# Allegro board VCO.brd
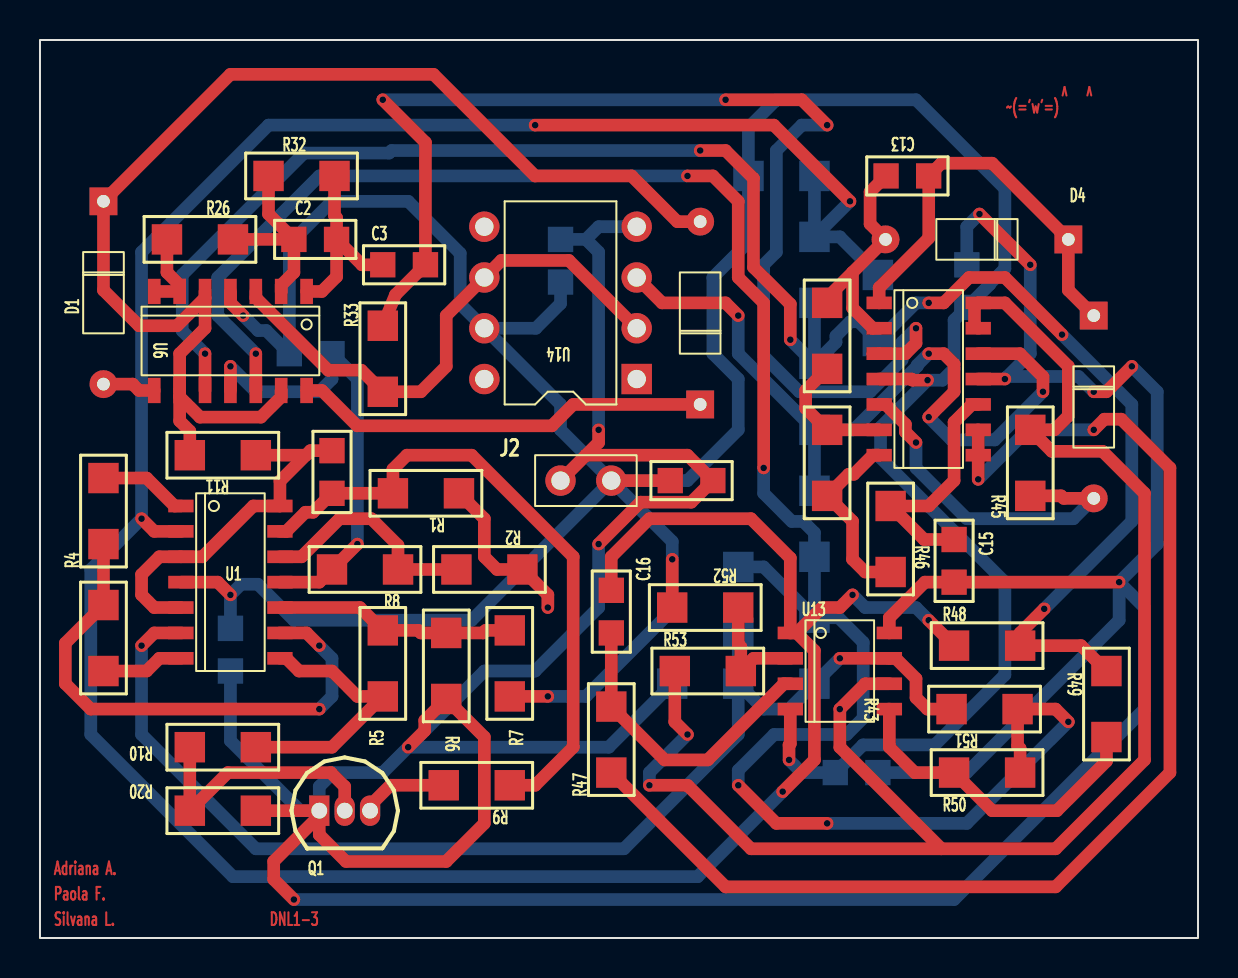
[diagram p0: board, top side]
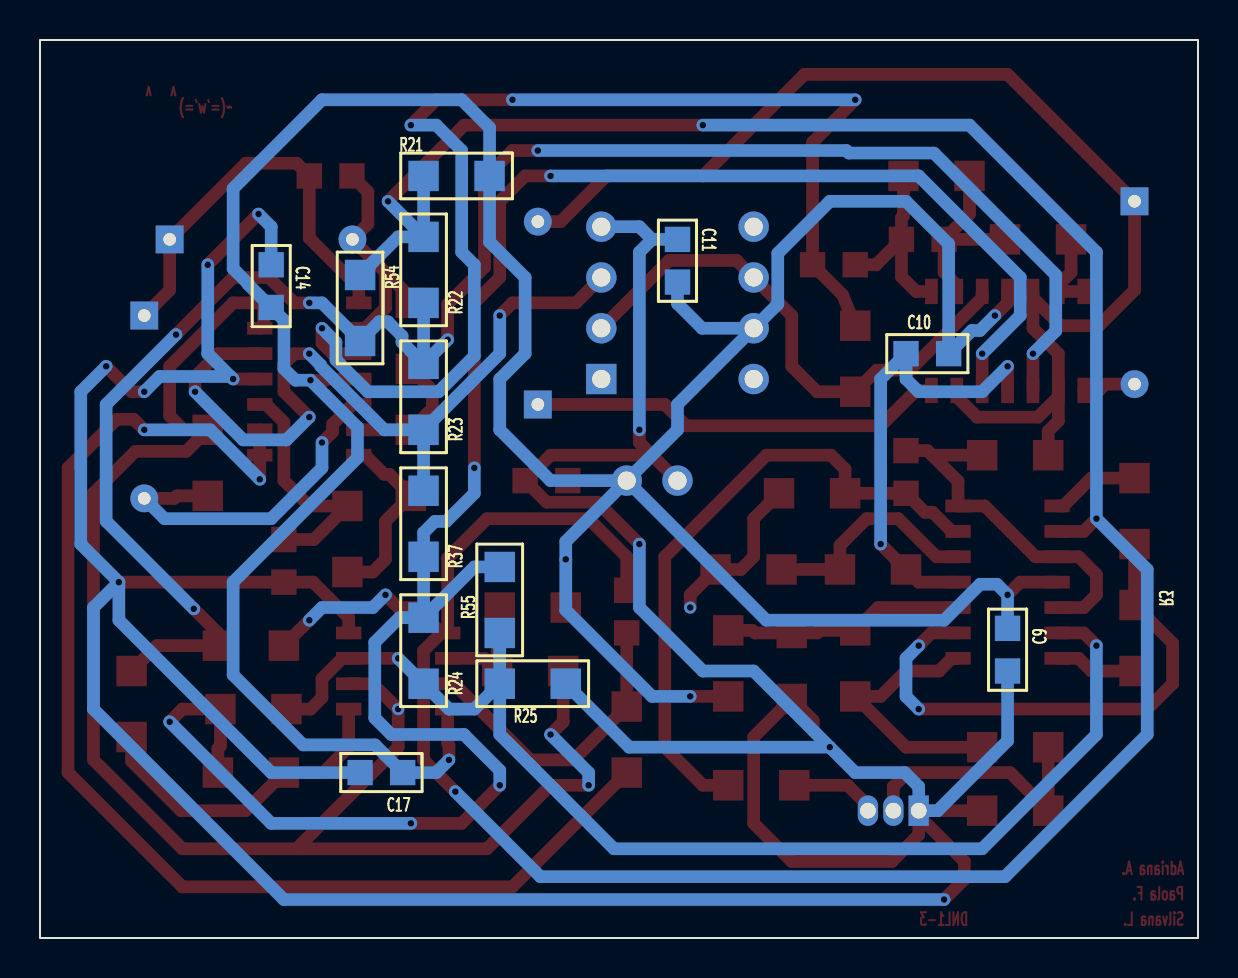
[diagram p1: board, bottom side, seen from below]

Outline 57.92 x 44.92 mm; copper layers: TOP, BOTTOM. Coordinates in mm from the lower left corner of the outline.
Outline path: rectangle 0,0 57.92,44.92

## Design rules (mm)
constraint set DEFAULT: min track width 0.127

## Placement (name value [footprint] x y rotation side)
C1  100n  [SMC0805]  14.61 22.25 90 top
C2  100n  [SMC0805]  12.7 34.95 0 top
C3  100n  [SMC0805]  17.14 33.68 0 top
C8  100u  [SMC0805]  33.66 22.88 180 top
C9  100n  [SMC0805]  9.53 13.36 90 bottom
C10  100n  [SMC0805]  14.61 29.23 180 bottom
C11  100n  [SMC0805]  26.04 34.95 270 bottom
C13  1n  [SMC0805]  44.45 38.12 180 top
C14  100n  [SMC0805]  46.35 33.68 270 bottom
C15  1n  [SMC0805]  45.72 17.8 90 top
C16  1n  [SMC0805]  28.57 15.26 90 top
C17  100n  [SMC0805]  41.91 8.28 180 bottom
D1  D1N4148  [DO35]  3.17 36.85 180 top
D2  D1N4148  [DO35]  33.02 26.69 0 top
D4  D1N4148  [DO35]  51.44 34.95 90 top
D5  D1N4148  [DO35]  52.7 31.13 180 top
J2  HEADER 2  [JUMPER2]  26.04 22.88 0 top
Q1  2N2222  [TO92]  13.97 6.37 0 top
R1  68k  [SMR1206]  20.95 22.25 180 top
R2  100k  [SMR1206]  24.13 18.43 180 top
R3  1k  [SMR1206]  3.17 13.36 90 top
R4  1k  [SMR1206]  3.17 19.7 90 top
R5  10k  [SMR1206]  17.14 12.08 90 top
R6  10k  [SMR1206]  20.32 15.26 270 top
R7  10k  [SMR1206]  23.5 12.08 90 top
R8  100k  [SMR1206]  14.61 18.43 0 top
R9  34k  [SMR1206]  23.5 7.64 180 top
R10  50k  [SMR1206]  10.79 9.54 180 top
R11  1k  [SMR1206]  10.79 24.15 180 top
R20  10k  [SMR1206]  10.79 6.37 180 top
R21  33k  [SMR1206]  38.73 38.12 180 bottom
R22  10k  [SMR1206]  38.73 31.77 90 bottom
R23  10k  [SMR1206]  38.73 25.42 90 bottom
R24  10k  [SMR1206]  38.73 12.72 90 bottom
R25  33k  [SMR1206]  34.92 12.72 180 bottom
R26  20k  [SMR1206]  6.35 34.95 0 top
R32  200k  [SMR1206]  11.43 38.12 0 top
R33  300k  [SMR1206]  17.14 27.32 90 top
R37  10k  [SMR1206]  38.73 19.07 90 bottom
R43  1k  [SMR1206]  39.37 31.77 270 top
R44  1k  [SMR1206]  39.37 25.42 270 top
R45  1k  [SMR1206]  49.53 25.42 270 top
R46  1k  [SMR1206]  42.55 21.61 270 top
R47  1k  [SMR1206]  28.57 8.28 90 top
R48  1k  [SMR1206]  45.72 14.62 0 top
R49  1k  [SMR1206]  53.34 13.36 270 top
R50  1k  [SMR1206]  45.72 8.28 0 top
R51  1k  [SMR1206]  48.9 11.45 180 top
R52  1k  [SMR1206]  34.92 16.53 180 top
R53  1k  [SMR1206]  31.75 13.36 0 top
R54  10k  [SMR1206]  41.91 29.86 90 bottom
R55  10k  [SMR1206]  34.92 15.26 90 bottom
U1  TL074/301/TI  [SOIC14]  9.53 17.8 0 top
U6  LM324  [SOIC14]  9.53 29.86 270 top
U12  LM324  [SOIC14]  44.45 27.96 0 top
U13  TL072/301/TI  [SOIC8]  40.01 13.36 0 top
U14  OP-07  [DIP8_3]  29.84 27.96 180 top

## Library data of the parts
C1-C3 C8-C11 C13-C17 = C
D1 D2 D4 D5 = 1N4148
J2 = HEADER 2
Q1 = 2N2222
R1-R11 R20-R26 R32 R33 R37 R43-R55 = R
U1 = TL074/301/TI
U6 U12 = LM324
U13 = TL072/301/TI
U14 = OP-07_1

## Footprints (pads in the part's own frame, mm; a bottom-side part is the same pattern mirrored in y, then rotated)
DIP8_3
  rect 1.524x1.524 hole 0.914: 1(0,0)
  round 1.524 hole 0.914: 2(0,-2.54) 3(0,-5.08) 4(0,-7.62) 5(7.62,-7.62) 6(7.62,-5.08) 7(7.62,-2.54) 8(7.62,0)
DO35
  rect 1.397x1.397 hole 0.635: 1(0,0)
  round 1.397 hole 0.635: 2(0,9.144)
JUMPER2
  round 1.524 hole 0.914: 1(0,0) 2(2.54,0)
SMC0805
  rect 1.27x1.27 smd: 1(0,0) 2(2.134,0)
SMR1206
  rect 1.524x1.524 smd: 1(0,0) 2(3.302,0)
SOIC8
  rect 1.27x0.635 smd: 1(-2.477,1.905) 2(-2.477,0.635) 3(-2.477,-0.635) 4(-2.477,-1.905) 5(2.477,-1.905) 6(2.477,-0.635) 7(2.477,0.635) 8(2.477,1.905)
SOIC14
  rect 1.27x0.635 smd: 1(-2.477,3.81) 2(-2.477,2.54) 3(-2.477,1.27) 4(-2.477,0) 5(-2.477,-1.27) 6(-2.477,-2.54) 7(-2.477,-3.81) 8(2.477,-3.81) 9(2.477,-2.54) 10(2.477,-1.27) 11(2.477,0) 12(2.477,1.27) 13(2.477,2.54) 14(2.477,3.81)
TO92
  rect 1.016x1.524 hole 0.787: 1(0,0)
  oval 1.016x1.524 hole 0.787: 2(1.27,0) 3(2.54,0)

## Nets
V1: C16.2 R21.1 R22.2 R48.1 R54.2 U1.2 U13.1
V2: R24.1 R25.1 R51.2 R55.1 U1.6 U13.7(OUT)
V3: R22.1 R23.2 R48.2 R49.1 R54.1 U6.10
V4: R24.2 R37.1 R50.2 R51.1 R55.2 U6.12
V75: R23.1 R37.2 U12.12 U14.3
VCC: C8.2 C9.2 C10.2 C11.2 C14.2 C17.2 J2.2 R7.1 R21.2 R52.2 U1.4 U6.4 U12.4 U13.4 U14.7
0: C8.1 C9.1 C10.1 C11.1 C14.1 C15.1 C17.1 J2.1 Q1.1(E) R6.2 R8.1 R20.1 R25.2 U1.11 U6.11 U12.11 U13.8 U14.4(V-)
VA: R47.1 U12.8 U12.9
VB: R45.1 R53.1 U12.13 U12.14(OUT) U13.6
N00332: R4.2 U1.1
N00346: R3.2 R4.1 U1.9
N00350: R3.1 U1.7
N00357: R5.2 R6.1 R7.2 U1.10
N00371: R5.1 R10.1 U1.8
N00444: C1.1 R1.2 R9.1 U1.13
N00448: R2.2 R8.2 U1.12
N00490: C1.2 R11.1 U1.3 U1.5 U1.14(OUT)
N00554: R1.1 R2.1
N00662: Q1.3 R9.2
N09126: D1.1 D2.2 R11.2 U6.5 U6.9 U6.13
N09132: D2.1 U6.14(OUT)
N14242: Q1.2 R10.2 R20.2
N15688: R26.1 U6.6 U6.7
N16018: C2.1 R26.2 R32.1 U6.2
N16067: C2.2 C3.1 R32.2 U6.1
N22621: R33.1 U6.3 U14.2 U14.6
N22667: C3.2 R33.2 U12.3
N37333: C13.2 D4.2 R43.1 U12.2
N37368: C13.1 D4.1 D5.1 U12.1
N37438: D5.2 R45.2 U12.5
N37529: R43.2 R44.1 U12.6
N37533: R44.2 R46.2 U12.7
N38440: C15.2 R46.1 U12.10
N39239: C16.1 R47.2 U13.3
N39433: R49.2 R50.1 U13.5
N39466: R52.1 R53.2 U13.2
N61440: U14.8
N61444: U14.1
N62378: U14.5
N090801: D1.2 U6.8

## Via types
v1: diameter 0.61, hole 0.33, TOP to BOTTOM, 55 vias

## Routing (per net, layer and track width the routed paths; a pad name or vN(x,y) marks a point on that pad's centre or on a via; arc(x,y) is an arc through that point)
V1: length 150.9
  TOP w0.635: v1(37.15,7.32) 38.73,8.91 38.73,14.37 37.85,15.26 ; v1(5.08,20.97) 5.71,20.34 U1.2 ; 37.85,15.26 39.12,16.53 40.01,16.53 v1(40.64,17.16) ; 37.85,15.26 U13.1 37.53,19.01 35.56,20.97 30.48,20.97 28.57,19.07 C16.2 ; v1(40.51,36.85) 36.7,40.66 v1(24.77,40.66) ; R48.1 v1(44.45,15.89)
  BOTTOM w0.635: R22.2 v1(40.51,36.85) ; R22.2 40.01,35.07 R54.2 ; R22.2 R21.1 ; v1(40.64,17.16) 41.27,16.53 43.81,16.53 v1(44.45,15.89) ; v1(37.15,7.32) 32.89,3.07 9.65,3.07 2.54,10.18 2.54,18.43 v1(5.08,20.97) 5.08,34.31 11.43,40.66 v1(24.77,40.66)
V2: length 60.2
  TOP w0.635: v1(5.08,14.62) 5.71,15.26 U1.6 ; v1(40.01,13.99) U13.7 42.8,13.99 43.81,12.97 43.81,12.02 44.39,11.45 R51.2
  BOTTOM w0.635: R25.1 34.92,10.18 29.21,4.46 10.79,4.46 5.08,10.18 v1(5.08,14.62) ; R25.1 36.2,11.45 37.47,11.45 R24.1 v1(40.01,13.99) ; R25.1 R55.1
V3: length 92.1
  TOP w0.635: R49.1 52.07,14.62 R48.2 49.02,15.26 v1(50.23,16.47) ; v1(51.12,30.18) 48.26,33.04 46.47,33.04 45.2,31.77 v1(44.45,31.77) ; v1(8.26,29.23) U6.10 ; v1(37.53,29.93) 37.53,31.71 35.69,33.55 35.69,37.99 34.29,39.39 v1(33.02,39.39)
  BOTTOM w0.635: R23.2 v1(37.53,29.93) ; R23.2 39.81,29.8 39.81,30.11 40.52,30.83 40.95,30.83 R54.1 43.81,31.77 v1(44.45,31.77) ; R23.2 R22.1 ; v1(33.02,39.39) 17.59,39.39 17.46,39.26 13.21,39.26 7.12,33.17 7.12,30.37 v1(8.26,29.23) ; v1(50.23,16.47) 54.61,20.85 54.61,26.69 v1(51.12,30.18)
V4: length 103
  TOP w0.635: v1(32.38,38.12) 33.66,38.12 34.92,36.85 34.92,33.04 36.2,31.77 v1(36.2,23.52) ; U6.12 v1(10.79,29.23) ; v1(39.37,5.73) 36.83,5.73 v1(34.92,7.64) ; v1(51.44,10.81) 50.8,11.45 R51.1 48.9,9.61 49.02,9.48 R50.2
  BOTTOM w0.635: R24.2 39.94,16.02 41.18,14.79 41.18,11.01 40.35,10.18 36.72,10.18 34.92,8.39 v1(34.92,7.64) ; R24.2 R37.1 38.73,20.28 38.17,20.84 37.6,20.84 36.2,22.25 v1(36.2,23.52) ; R24.2 36.2,18.56 R55.2 ; v1(51.44,10.81) 46.35,5.73 v1(39.37,5.73) ; v1(10.79,29.23) 8.89,31.13 8.89,33.04 13.97,38.12 v1(32.38,38.12)
V75: length 39.9
  TOP w0.635: v1(50.16,27.32) 50.16,28.07 49.01,29.23 U12.12 ; v1(44.45,26.05) 45.72,27.32 45.72,28.71 45.2,29.23 v1(44.45,29.23) ; U14.3 31.11,31.77 34.29,31.77 v1(34.92,31.13)
  BOTTOM w0.635: R23.1 R37.2 ; R23.1 34.92,29.23 v1(34.92,31.13) ; R23.1 40.7,25.42 43.88,28.6 43.88,28.66 v1(44.45,29.23) ; v1(50.16,27.32) 47.76,24.92 45.59,24.92 v1(44.45,26.05)
VCC: length 177.8
  TOP w0.635: 31.62,16.53 v1(31.62,18.94) ; U6.4 9.53,31.77 v1(10.16,31.13) ; U12.4 43.59,27.96 43.64,27.9 v1(44.39,27.9) ; U13.4 37.53,9.72 37.47,9.66 v1(37.47,8.91) ; J2.2 C8.2 ; R7.1 v1(25.4,12.08) ; v1(9.53,17.16) 8.89,17.8 U1.4
  BOTTOM w0.635: J2.2 21.59,15.89 12.7,15.89 10.9,17.7 10.05,17.7 v1(9.53,17.16) C9.2 ; J2.2 31.62,19.83 v1(31.62,18.94) 31.62,16.4 27.3,12.08 v1(25.4,12.08) ; J2.2 26.04,25.42 26.04,26.69 U14.7 ; J2.2 32.38,22.88 34.92,25.42 34.92,27.96 33.66,29.23 33.66,33.04 35.43,34.82 R21.2 35.43,40.53 36.83,41.93 43.81,41.93 48.26,37.49 48.26,33.48 47.5,32.72 47.5,32.68 C14.2 45.72,30.91 45.72,28.48 45.14,27.9 v1(44.39,27.9) 42.04,25.55 42.04,24.02 48.26,17.8 48.26,13.16 44.76,9.66 41.16,9.66 C17.2 38.1,8.28 v1(37.47,8.91) ; U14.7 21.02,31.71 21.02,34.25 18.41,36.85 14.61,36.85 12.47,34.72 C10.2 11.32,30.39 10.91,30.39 v1(10.16,31.13) ; U14.7 24.8,30.5 26.04,31.73 C11.2
0: length 246.5
  TOP w0.635: U12.11 v1(48.26,27.96) ; R20.1 Q1.1 13.97,6.12 ; v1(54.61,28.59) 53.34,27.32 v1(52.7,27.32) ; U1.11 13.97,17.8 R8.1 v1(15.88,19.7) ; 27.3,24.15 27.94,24.79 v1(27.94,25.42) ; 27.3,24.15 J2.1 ; 27.3,24.15 32.38,24.15 C8.1 32.58,21.8 30.04,21.8 v1(27.94,19.7) ; U6.11 v1(9.53,28.59) ; U13.8 42.48,16.02 44.26,17.8 C15.1 v1(53.98,17.8) ; 13.97,6.12 11.69,3.83 11.69,2.94 v1(12.7,1.93) ; 13.97,6.12 13.97,5.16 15.3,3.83 20.32,3.83 22.23,5.73 22.23,10.05 R6.2 19.24,10.88 19.24,10.37 v1(18.41,9.54) ; v1(49.53,33.68) v1(46.99,36.22)
  BOTTOM w0.635: v1(12.7,1.93) 45.72,1.93 55.24,11.45 55.24,16.53 v1(53.98,17.8) ; C11.1 27.3,34.95 ; 27.3,34.95 27.94,35.58 U14.4 ; 27.3,34.95 27.94,34.31 v1(27.94,25.42) ; v1(15.88,19.7) 15.88,27.96 C10.1 14.61,27.96 13.97,27.32 10.79,27.32 v1(9.53,28.59) ; 48.39,28.09 49.53,29.23 v1(49.53,33.68) ; 48.39,28.09 51.94,28.09 v1(52.7,27.32) ; 48.39,28.09 v1(48.26,27.96) ; v1(46.99,36.22) 46.35,35.58 C14.1 ; v1(53.98,17.8) 55.88,19.7 55.88,27.32 v1(54.61,28.59) ; v1(53.98,17.8) 53.98,15.89 46.35,8.28 C17.1 ; C9.1 9.53,9.86 13.02,6.37 Q1.1 13.97,7.58 14.67,8.28 17.14,8.28 v1(18.41,9.54) ; 31.62,12.72 28.45,9.54 v1(18.41,9.54) ; v1(27.94,19.7) 27.94,16.53 24.77,13.36 22.23,13.36 v1(18.41,9.54)
VA: length 62.2
  TOP w0.635: v1(46.93,22.94) U12.8 U12.9 ; v1(52.7,25.42) 53.23,25.95 54.08,25.95 56.52,23.52 56.52,8.28 50.8,2.56 34.29,2.56 R47.1
  BOTTOM w0.635: v1(46.93,22.94) 49.4,25.42 v1(52.7,25.42)
VB: length 79.1
  TOP w0.635: 45.09,4.46 40.01,9.54 v1(40.01,11.45) 41.27,12.72 U13.6 ; 45.09,4.46 50.8,4.46 55.24,8.91 55.24,22.25 53.15,24.34 50.61,24.34 R45.1 50.74,25.42 51.44,26.12 51.44,28.59 48.26,31.77 U12.14 46.74,31.58 46.74,30.69 U12.13 ; 45.09,4.46 35.56,4.46 32.38,7.64 v1(30.48,7.64) ; v1(32.38,10.18) 31.75,10.81 R53.1
  BOTTOM w0.635: v1(30.48,7.64) 30.48,8.28 v1(32.38,10.18)
N00332: length 4.5
  TOP w0.635: U1.1 6.73,21.61 5.33,23.01 R4.2
N00346: length 26.9
  TOP w0.635: v1(13.97,11.45) 2.54,11.45 1.27,12.72 1.27,14.75 R3.2 R4.1 ; U1.9 13.34,15.26 v1(13.97,14.62)
  BOTTOM w0.635: v1(13.97,11.45) 14.61,12.08 14.61,13.99 v1(13.97,14.62)
N00350: length 4.1
  TOP w0.635: U1.7 5.97,13.99 5.33,13.36 R3.1
N00357: length 12.1
  TOP w0.635: R7.2 22.29,15.39 22.16,15.26 R6.1 19.05,15.26 18.92,15.39 R5.2 16,16.53 U1.10
N00371: length 13.3
  TOP w0.635: U1.8 12.32,13.99 12.95,13.36 14.61,13.36 15.88,12.08 R5.1 14.61,9.54 R10.1
N00444: length 32.5
  TOP w0.635: R9.1 24.77,7.64 26.67,9.54 26.67,19.07 21.59,24.15 18.35,24.15 17.65,23.45 R1.2 C1.1 13.66,21.3 13.27,21.3 12.32,20.34 U1.13
N00448: length 11.4
  TOP w0.635: U1.12 13.08,19.07 14.99,20.97 16.57,20.97 17.91,19.64 R8.2 R2.2
N00490: length 18.6
  TOP w0.635: C1.2 13.53,24.38 13.3,24.15 ; 13.3,24.15 12,22.85 U1.14 10.67,21.61 8.13,19.07 U1.3 5.97,19.07 5.08,18.18 5.08,17.16 5.71,16.53 U1.5 ; 13.3,24.15 R11.1
N00554: length 8.3
  TOP w0.635: v1(25.4,16.53) 25.4,17.16 R2.1 22.86,18.43 22.23,19.07 22.23,20.97 R1.1
N00662: length 4.4
  TOP w0.635: R9.2 17.53,7.64 16.51,6.62 Q1.3
N09126: length 61.5
  TOP w0.635: R11.2 7.49,25.36 6.99,25.86 6.99,27.07 ; 6.99,27.07 8,26.05 11.05,26.05 12.06,27.07 12.06,27.39 ; 6.99,27.07 U6.9 6.99,29.23 8.26,30.5 8.26,32.02 ; D2.2 31.88,35.83 29.59,38.12 24.77,38.12 19.68,43.2 9.53,43.2 D1.1 3.17,32.41 4.95,30.63 6.86,30.63 8.26,32.02 ; 8.26,32.02 U6.5
N09132: length 20.9
  TOP w0.635: D2.1 26.67,26.69 25.6,25.62 15.86,25.62 14.1,27.39 U6.14
N14242: length 13.2
  TOP w0.635: Q1.2 15.24,7.58 14.54,8.28 9.4,8.28 R20.2 R10.2
N15688: length 4.1
  TOP w0.635: R26.1 6.35,33.29 6.99,32.66 U6.6 U6.7
N16018: length 9.6
  TOP w0.635: C2.1 11.43,36.22 R32.1 ; C2.1 R26.2 ; C2.1 12.7,33.29 12.06,32.66 12.06,32.34
N16067: length 9.7
  TOP w0.635: C2.2 16.1,33.68 C3.1 ; C2.2 14.83,36.02 14.73,36.13 R32.2 ; C2.2 14.83,33.08 14.1,32.34 U6.1
N22621: length 26.9
  TOP w0.635: U6.3 10.79,32.02 14.42,28.4 16.07,28.4 R33.1 19.05,27.32 20.32,28.59 20.32,31.13 U14.6 23.08,33.89 26.45,33.89 U14.2
N22667: length 62.6
  TOP w0.635: 41.66,29.23 U12.3 43.29,29.23 43.81,29.75 v1(43.81,30.5) ; v1(34.29,41.93) 38.1,41.93 v1(39.37,40.66) ; v1(17.14,41.93) 19.28,39.8 C3.2 17.78,32.18 R33.2
  BOTTOM w0.635: v1(43.81,30.5) 43.12,29.8 43.12,28.92 41.52,27.32 37.98,27.32 36.2,29.11 36.2,33.68 36.83,34.31 36.83,39.39 38.1,40.66 v1(39.37,40.66) ; v1(17.14,41.93) v1(34.29,41.93)
N37333: length 11.7
  TOP w0.635: C13.2 41.52,37.32 41.52,35.72 D4.2 40.64,33.29 ; R43.1 39.37,32.02 40.64,33.29 ; U12.2 41.66,30.5 40.64,31.52 40.64,33.29
N37368: length 20.5
  TOP w0.635: U12.1 41.97,32.53 44.45,35.01 C13.1 45.09,38.76 47.62,38.76 D4.1 51.44,32.41 D5.1
N37438: length 17.7
  TOP w0.635: U12.5 42.29,26.69 43.28,25.7 43.28,25.32 v1(43.81,24.79) ; 52.7,21.99 51.2,21.99 51.08,22.12 R45.2
  BOTTOM w0.635: 52.7,21.99 51.69,20.97 46.35,20.97 43.81,23.52 v1(43.81,24.79)
N37529: length 6.5
  TOP w0.635: R43.2 38.3,27.39 38.3,26.5 R44.1 U12.6
N37533: length 9.3
  TOP w0.635: R46.2 41.27,18.31 40.64,18.94 40.64,20.85 R44.2 40.45,23.19 40.7,23.19 41.66,24.15 U12.7
N38440: length 12.1
  TOP w0.635: C15.2 44.22,19.93 R46.1 44.45,21.61 45.72,22.88 45.72,25.8 46.61,26.69 U12.10
N39239: length 15.3
  TOP w0.635: C16.1 R47.2 31.24,8.91 33.4,8.91 37.21,12.72 U13.3
N39433: length 16.3
  TOP w0.635: 53.34,10.05 53.34,8.85 50.86,6.37 47.62,6.37 R50.1 43.75,8.28 42.48,9.54 U13.5
N39466: length 6
  TOP w0.635: R52.1 34.92,14.69 35.05,14.56 R53.2 35.69,13.99 U13.2
N090801: length 2.7
  TOP w0.635: U6.8 4.95,27.39 4.64,27.71 3.17,27.71

## Text on the board
TOP: Adriana A. | Paola F. | Silvana L. | DNL1-3 | ~(='w'=) | v   v
